# Altium PCB PCB2.PcbDoc (part 2 of 2)
Units mm, origin at the board's own origin, x right, y up, seen from the top; angles counter-clockwise.
Board outline 147.4 x 113.58 mm, 2 copper layers (Top Layer, Bottom Layer); 216 components, 177 nets, 669 pads, 177 vias.
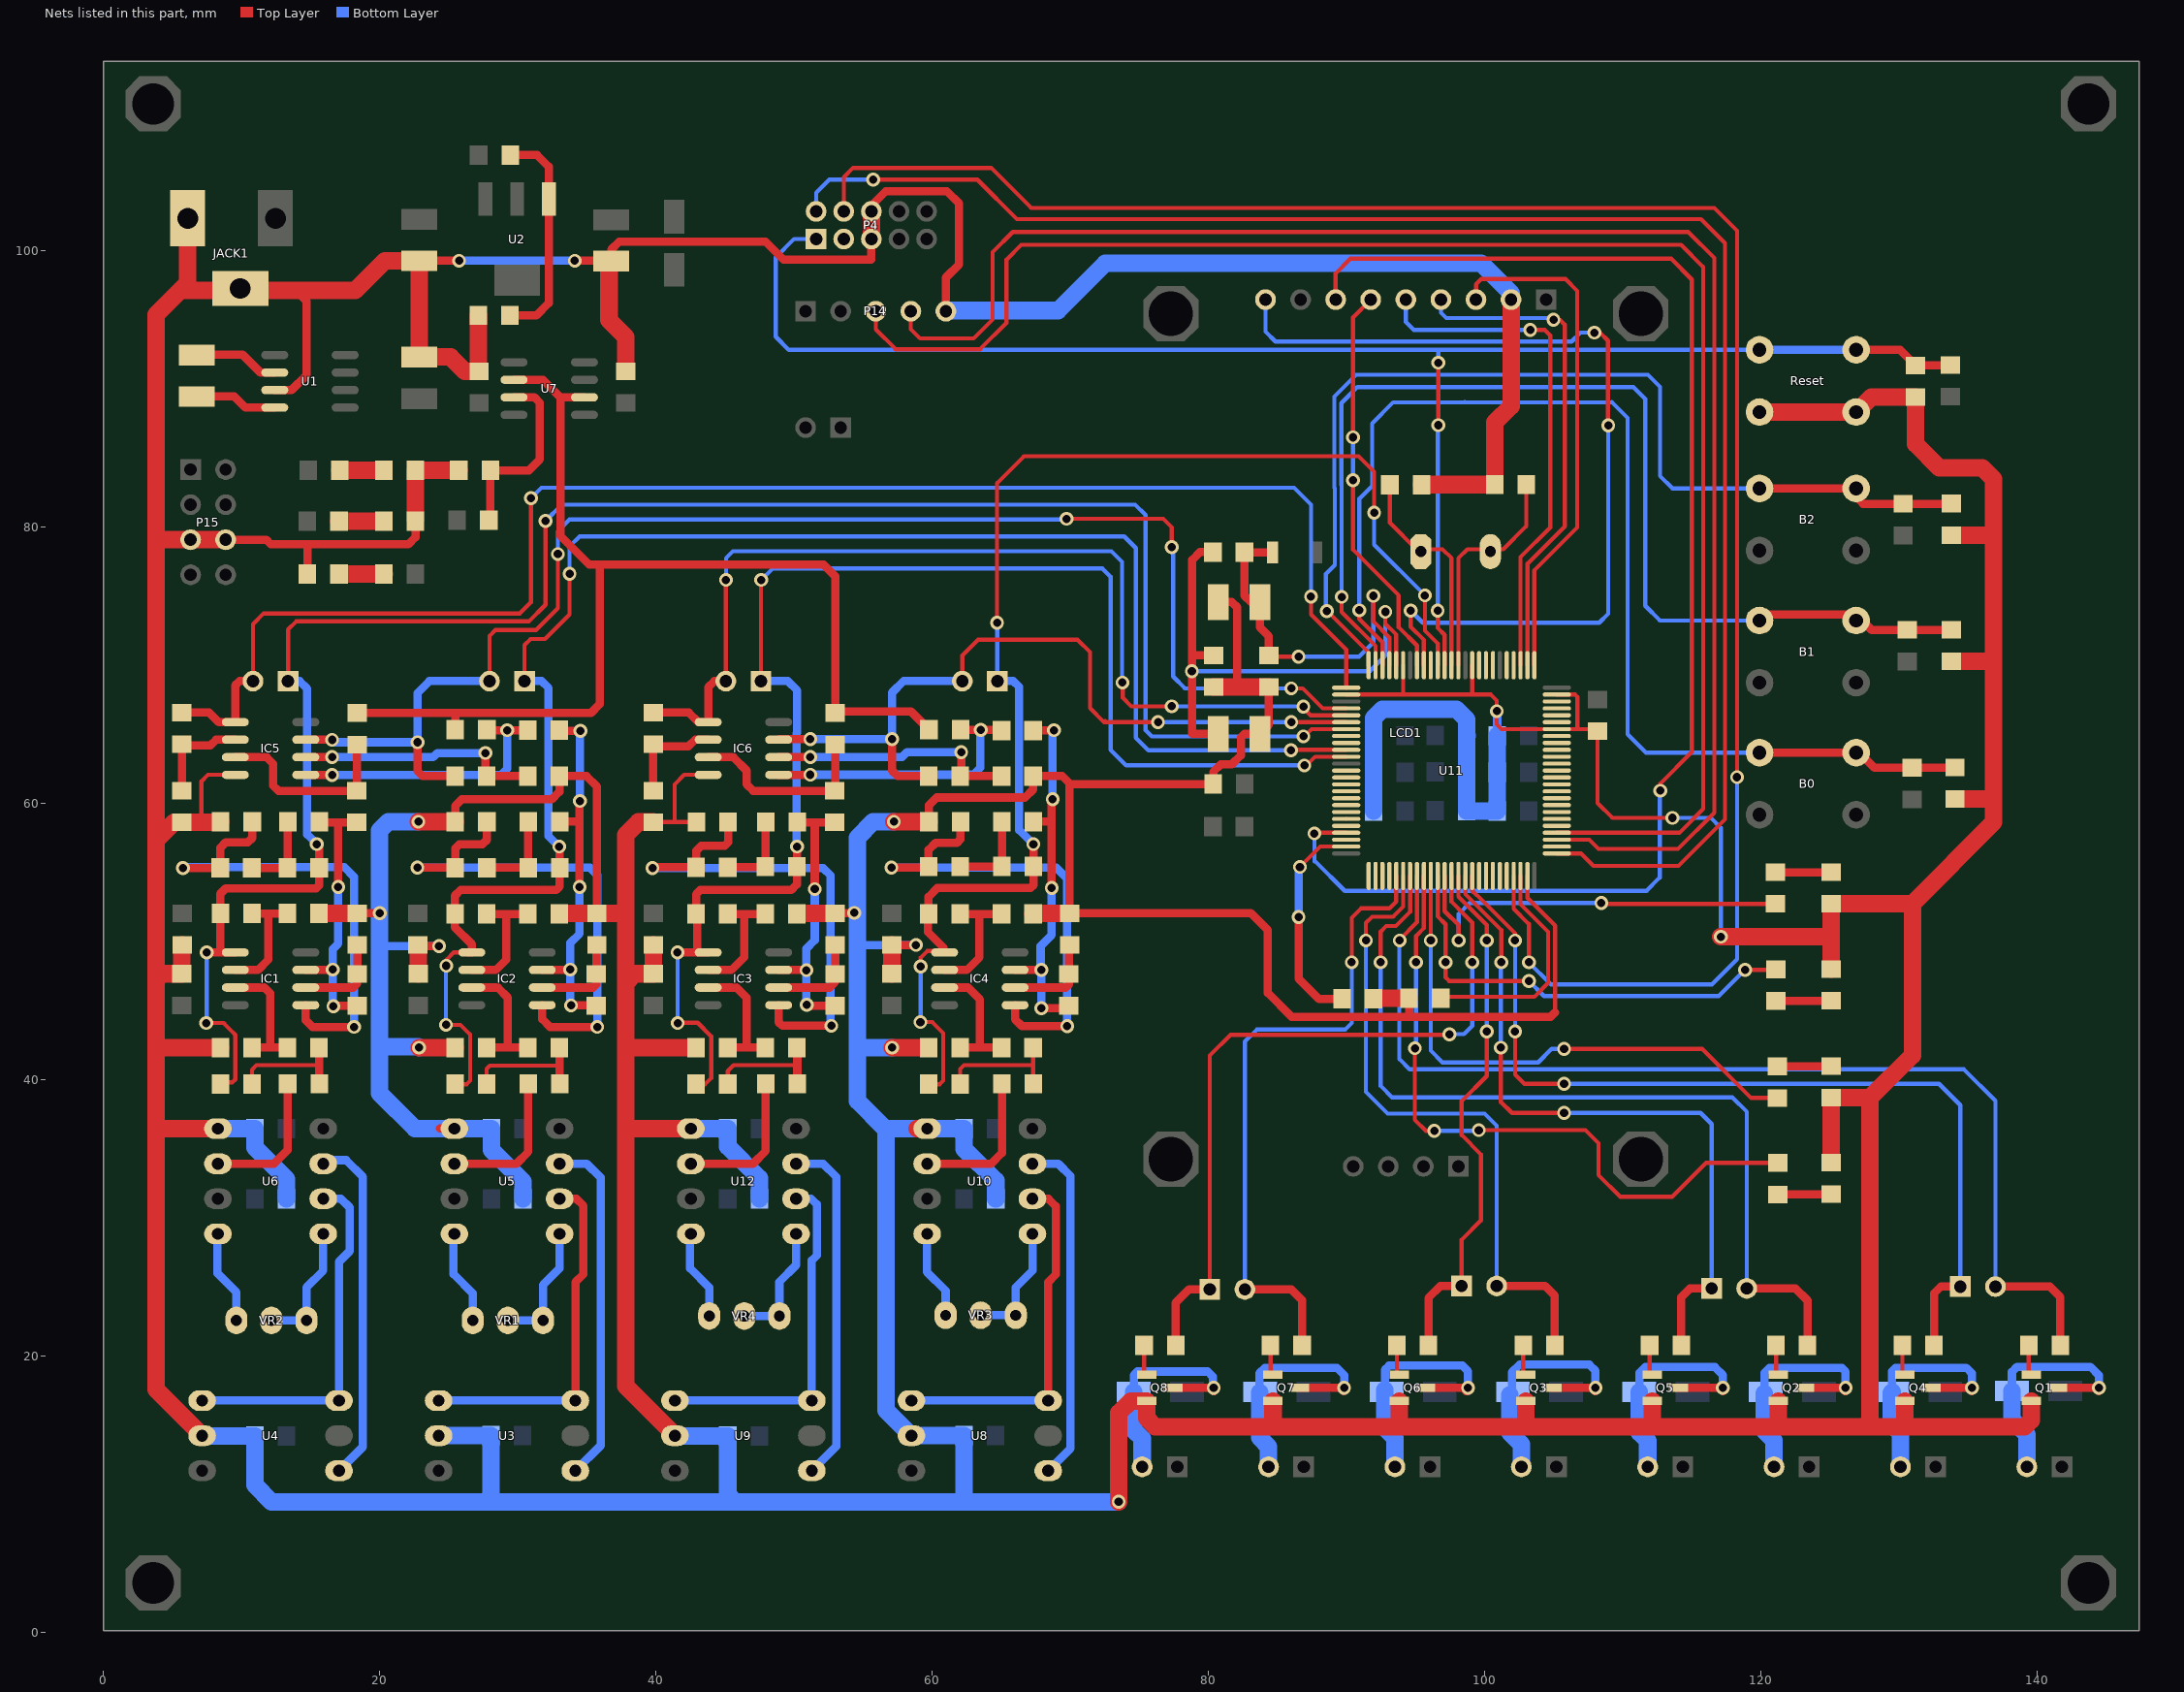
[diagram p2: the nets of this part, all layers, seen from the top]

## Via types
v1: diameter 1, hole 0.6, Top Layer to Bottom Layer, 177 vias

## Nets (pads, with @x,y where several pads share a name; then routed paths per layer and width w, separated by ;. In a path a pad name is that pad's centre, name@x,y a point inside that pad or via, vN(x,y) a via of type N, cw(c..) or ccw(c..) an arc to the next point about the centre after c; other vN are vias at no path point) (continued)
GND: C2.1 C3.2 C4.2 C5.2 C6.2 C7.1 C8.1 C9.2 C10.2 C11.1 C12.1 C13.2 C14.2 C15.1 C16.1 C17.1 C18.1 C21.2 C22.2 C27.2 C28.1 C29.2 C30.1 C31.2 C32.1 C33.1 C34.2 C35.1 C36.1 C37.1 C38.1 C39.1 C40.1 C41.1 C42.1 C43.1 C44.1 C45.1 C46.2 C50.2 C51.2 C52.2 C55.2 C56.2 C61.2 C62.2 C63.2 C64.2 D10.1 IC5.4 IC6.4 JACK1.2 JACK1.3 LCD1.2 P4.5 P4.6 P14.5 P15.5 P15.6 Q1.1 Q2.1 Q3.1 Q4.1 Q5.1 Q6.1 Q7.1 Q8.1 R11.2 R12.2 R13.2 R14.1 R22.1 R23.1 R24.1 R26.1 R28.1 R30.1 R37.1 R39.1 R41.1 R43.1 R44.1 R45.1 R53.1 R54.1 R55.1 R57.1 R59.1 R61.1 R67.1 R69.1 R71.2 R72.2 R73.2 R74.2 Reset.1 U1.3 U3.5 U4.5 U5.5 U6.5 U8.5 U9.5 U10.5 U11.10 U11.20 U11.27 U11.74 U11.94 U11.99 U12.5 | length 1072.8
  Top Layer w0.3: 7.1,58.599 7.1,61.575 7.57,62.045 IC5.4@9.55,62.045 ; R23.1@8.439,58.65 R23.1@8.489,58.7 ; R67.1@39.826,58.625 41.35,58.625 ; R53.1@42.939,58.625 41.35,58.625 ; IC6.4@43.783,62.045 42.045,62.045 41.35,61.35 41.35,58.625 ; U11.27@89.975,67.85 94,67.85 ; U11.20@94.1,69.975 94.1,67.95 94,67.85 ; U11.10@99.1,69.975 99.1,67.85 ; U11.74@103.1,54.725 103.1,53.125 105.1,51.125 105.1,44.85 ; U11.99@105.225,67.85 106.55,67.85 106.725,67.675 106.725,65.35 ; v1(113.6,58.925) 109.25,58.925 108.175,60 C29.2@108.175,65.207 108.032,65.35 106.725,65.35 ; 94,67.85 99.1,67.85 ; 99.1,67.85 100.45,67.85 100.875,67.425 v1(100.875,66.65) 100.875,65.7 101.225,65.35 U11.94@105.225,65.35 106.725,65.35
  Top Layer w0.6: C52.2@8.375,42.389 C52.2@8.464,42.3 ; P15.6@8.851,79.06 11.79,79.06 12.125,78.725 22.075,78.725 22.586,79.236 R13.2@22.586,80.397 ; U1.3@12.4,89.89 13.615,89.89 14.7,90.975 14.7,96.33 13.91,97.12 ; D10.1@14.772,76.588 14.772,78.725 ; R30.1@18.375,52.018 19.993,52.018 v1(20,52.025) ; C21.2@22.8,49.682 22.893,49.775 23.018,49.65 v1(24.3,49.65) ; C3.2@22.875,99.25 v1(25.75,99.25) ; 24.365,36.435 U5.5@25.407,36.435 ; R22.1@25.475,58.65 25.475,59.8 25.95,60.275 32.475,60.275 33.011,60.811 R37.1@33.011,61.95 34.975,61.95 35.725,61.2 R26.1@35.725,52.026 ; v1(34.125,99.25) 36.4,99.25 C4.2@36.6,99.05 ; C4.2@36.775,99.225 36.775,100.075 37.325,100.625 47.95,100.625 49.25,99.325 55.575,99.325 55.597,99.347 P4.5@55.597,100.825 ; R57.1@52.975,52.018 54.382,52.018 54.354,52.046 v1(54.354,52.053) ; P4.6@55.597,102.822 P4.6@55.6,102.825 ; P4.6@55.597,102.825 55.597,103.247 56.625,104.275 61.075,104.275 61.95,103.4 61.95,98.985 60.995,98.03 P14.5@60.995,95.6 P14.5@61.025,95.63 ; C56.2@57.075,49.74 57.09,49.725 v1(58.825,49.725) ; R54.1@59.764,58.65 59.764,59.839 60.325,60.4 66.725,60.4 67.311,60.986 R69.1@67.311,61.95 69.425,61.95 69.95,61.425 R61.1@69.95,52.026 83.074,52.026 84.3,50.8 84.3,46.25 86,44.55 86.025,44.525 104.775,44.525 105.1,44.85 ; 70,61.375 R41.1@80.35,61.375 80.35,62.25 80.9,62.8 81.7,62.8 82.35,63.45 82.35,64.75 82.6,65 C31.2@83.724,65 84.372,65.648 C34.2@84.372,68.407 ; C33.1@80.724,74.55 81.7,74.55 82.075,74.175 82.075,68.407 ; 94.532,44.525 C36.1@94.532,45.875
  Top Layer w1.27: 4.435,79.06 P15.5@6.311,79.06 P15.6@8.851,79.06 ; C22.2@5.7,49.732 5.675,49.707 C50.2@5.675,47.643 4.268,47.643 3.8,47.175 ; JACK1.2@6.1,102.325 6.1,97.65 5.57,97.12 ; U4.5@7.147,14.21 3.8,17.557 3.8,36.525 ; U6.5@8.29,36.435 3.89,36.435 3.8,36.525 ; R23.1@8.389,58.599 7.1,58.599 R39.1@5.675,58.599 5.099,58.599 3.8,57.3 ; R23.1@8.439,58.65 R23.1@8.489,58.65 ; C52.2@8.464,42.3 3.8,42.3 ; JACK1.3@10.1,97.145 JACK1.3@10.125,97.12 ; R28.1@15.6,52 18.357,52 R30.1@18.375,52.018 ; R13.2@22.586,80.5 R11.2@22.586,84.085 R14.1@25.725,84.085 ; C27.2@22.8,47.643 C21.2@22.8,49.682 ; v1(22.8,58.65) R22.1@25.475,58.65 ; v1(22.85,42.3) C51.2@25.45,42.3 ; R12.2@27.146,95.3 27.146,91.309 C10.2@27.197,91.258 26.167,91.258 25.125,92.3 22.9,92.3 C2.1@22.875,92.275 C3.2@22.875,99.25 20.375,99.25 18.245,97.12 13.91,97.12 JACK1.3@10.125,97.12 ; R24.1@33.011,51.975 33.062,52.026 R26.1@35.725,52.026 37.776,52.026 37.8,52.05 ; C4.2@36.6,99.05 36.6,94.975 37.825,93.75 C9.2@37.825,91.258 ; C55.2@39.825,49.74 39.8,49.714 C61.2@39.8,47.643 38.468,47.643 37.8,46.975 ; R67.1@39.826,58.625 38.725,58.625 37.8,57.7 37.8,52.05 ; U9.5@41.38,14.21 37.8,17.79 37.8,36.55 ; U12.5@42.523,36.435 37.915,36.435 37.8,36.55 ; C63.2@42.914,42.3 37.9,42.3 37.8,42.2 ; R55.1@50.211,52.018 R57.1@52.975,52.018 ; P4.5@55.597,100.825 P4.6@55.597,102.825 ; C62.2@57.075,47.643 C56.2@57.075,49.74 ; v1(57.1,42.3) C64.2@59.739,42.3 ; v1(57.225,58.65) R54.1@59.764,58.65 ; U10.5@58.915,36.435 U10.5@59.64,36.435 ; R59.1@67.311,51.975 67.362,52.026 R61.1@69.95,52.026 ; v1(73.5,9.425) 73.5,15.85 74.375,16.725 Q8.1@75.525,16.725 75.525,15.475 76.15,14.85 84.7,14.85 ; C32.1@80.376,68.407 82.075,68.407 C34.2@84.372,68.407 ; Q7.1@84.675,16.725 84.675,14.875 84.7,14.85 ; C35.1@91.968,45.825 92.018,45.875 C36.1@94.532,45.875 ; Q6.1@93.825,16.725 93.825,14.925 93.9,14.85 ; C30.1@95.421,83.025 95.446,83.05 C28.1@100.729,83.05 100.729,87.554 101.913,88.738 LCD1.2@101.913,96.441 ; Q3.1@102.975,16.725 102.975,14.95 103.075,14.85 ; Q5.1@112.125,16.725 112.125,14.9 112.175,14.85 ; v1(117.1,50.325) 125.075,50.325 ; Reset.1@119.9,88.3 Reset.1@126.9,88.3 127.994,89.394 C46.2@131.2,89.394 131.2,86 132.925,84.275 136.025,84.275 136.855,83.445 136.855,70.27 ; Q2.1@121.275,16.725 121.275,14.9 121.325,14.85 ; R74.2@125.075,33.983 125.1,34.008 R73.2@125.1,38.674 127.9,38.674 ; R72.2@125.075,47.988 125.075,50.325 ; Q4.1@130.425,16.725 130.425,14.95 130.525,14.85 ; R44.1@133.8,70.27 136.855,70.27 ; R45.1@133.8,79.395 136.695,79.395 136.855,79.555 ; R43.1@134.05,60.295 136.855,60.295 ; Q1.1@139.575,16.725 139.575,15.325 139.1,14.85 130.525,14.85 ; 3.8,36.525 3.8,42.3 ; 3.8,42.3 3.8,47.175 ; 3.8,47.175 3.8,57.3 ; 3.8,57.3 3.8,95.35 5.57,97.12 ; 5.57,97.12 JACK1.3@10.125,97.12 ; 37.8,36.55 37.8,42.2 ; 37.8,42.2 37.8,46.975 ; 37.8,46.975 37.8,52.05 ; 84.7,14.85 93.9,14.85 ; 93.9,14.85 103.075,14.85 ; 103.075,14.85 112.175,14.85 ; 112.175,14.85 121.325,14.85 ; 121.325,14.85 127.475,14.85 ; 125.075,50.325 R71.2@125.075,52.724 130.974,52.724 ; 127.475,14.85 130.525,14.85 ; 127.475,14.85 127.9,15.275 127.9,38.674 ; 127.9,38.674 130.974,41.748 130.974,52.724 ; 130.974,52.724 136.855,58.605 136.855,60.295 ; 136.855,60.295 136.855,70.27
  Bottom Layer w0.3: v1(113.6,58.925) 116.375,58.925 117.1,58.2 v1@117.1,50.25
  Bottom Layer w0.6: 20.175,49.65 v1(24.3,49.65) ; v1(25.75,99.25) v1(34.125,99.25) ; 54.575,49.825 54.7,49.7 54.725,49.725 v1(58.825,49.725) ; v1(100.875,66.65) 100.875,66.711 100.907,66.743 C43.1@100.907,64.875
  Bottom Layer w1.27: U4.5@7.147,14.21 7.16,14.197 C8.1@10.97,14.197 10.97,10.63 12.175,9.425 27.65,9.425 ; U6.5@8.29,36.435 8.303,36.422 C12.1@10.97,36.422 10.97,35.055 13.256,32.769 C6.2@13.256,31.342 ; v1(22.8,58.65) 20.625,58.65 20,58.025 v1(20,52.025) 20,42.35 ; v1(22.85,42.3) 22.8,42.35 20,42.35 ; U3.5@24.264,14.21 24.276,14.223 C7.1@28.061,14.223 28.061,9.8 ; 28.061,9.836 27.65,9.425 ; C5.2@30.372,31.342 30.372,32.603 28.086,34.889 C11.1@28.086,36.422 25.419,36.422 U5.5@25.407,36.435 22.565,36.435 20,39 20,42.35 ; U9.5@41.38,14.21 41.393,14.197 C16.1@45.203,14.197 45.203,9.425 ; U12.5@42.523,36.435 42.536,36.422 C18.1@45.203,36.422 45.203,35.122 47.489,32.836 C14.2@47.489,31.342 ; 45.453,9.425 73.275,9.425 73.475,9.625 v1@73.5,9.625 ; 45.453,9.675 45.203,9.425 ; v1(57.1,42.3) 54.6,42.3 54.575,42.275 ; v1(57.225,58.65) 55.725,58.65 54.575,57.5 54.575,49.825 54.575,42.275 ; P14.5@60.995,95.6 61.045,95.65 69.125,95.65 72.535,99.06 99.74,99.06 101.913,96.887 LCD1.2@101.913,96.441 ; 62.294,9.425 C15.1@62.294,14.223 62.282,14.21 U8.5@58.497,14.21 56.662,16.045 56.662,36.363 56.59,36.435 ; C13.2@64.606,31.342 64.606,32.669 62.32,34.955 C17.1@62.32,36.422 59.653,36.422 U10.5@59.64,36.435 56.59,36.435 ; C38.1@91.957,59.425 C39.1@91.957,62.225 C40.1@91.957,64.875 91.957,66.157 92.6,66.8 97.95,66.8 98.693,66.057 C37.1@98.693,64.9 ; C37.1@98.718,64.875 C37.1@98.693,64.9 ; C43.1@100.907,64.875 C42.1@100.907,62.225 C41.1@100.907,59.425 98.718,59.425 C44.1@98.693,59.45 C45.1@98.693,62.25 C37.1@98.693,64.9 ; 27.65,9.425 45.203,9.425 ; 54.575,42.275 54.575,38.45 56.59,36.435
LCD_CS: LCD1.3 U11.1 | length 37.3
  Top Layer w0.3: LCD1.3@99.373,96.441 99.373,97.548 99.75,97.925 105.85,97.925 106.7,97.075 106.7,79.95 103.6,76.85 U11.1@103.6,69.975
LCD_DC: LCD1.5 U11.3 | length 37.2
  Top Layer w0.3: U11.3@102.6,69.975 102.6,77.8 104.75,79.95 104.75,93.85 104.35,94.25 v1(103.3,94.25)
  Bottom Layer w0.3: LCD1.5@94.293,96.441 94.293,94.832 94.875,94.25 v1(103.3,94.25)
LCD_MISO: LCD1.9 U11.17 | length 67
  Top Layer w0.3: v1@94.65,73.9 94.65,72.75 95.6,71.8 U11.17@95.6,69.975 ; v1(107.95,94.05) 108.35,94.05 108.925,93.475 108.925,87.35 v1(108.95,87.325)
  Bottom Layer w0.3: LCD1.9@84.133,96.441 84.133,94.117 84.85,93.4 106.3,93.4 106.95,94.05 v1(107.95,94.05) ; v1(94.65,73.925) 95.525,73.05 108.3,73.05 108.95,73.7 v1(108.95,87.325)
LCD_MOSI: LCD1.6 U11.18 | length 28.9
  Top Layer w0.3: v1(90.475,83.375) 90.475,78.325 93.775,75.025 93.775,72.725 95.1,71.4 U11.18@95.1,69.975 ; v1(90.475,86.475) 90.475,95.163 LCD1.6@91.753,96.441
  Bottom Layer w0.3: v1(90.475,83.375) v1(90.475,86.475)
LCD_RST: LCD1.4 U11.2 | length 36.1
  Top Layer w0.3: U11.2@103.1,69.975 103.1,77.325 105.8,80.025 105.8,94.625 105.425,95 105.405,94.98 v1(104.981,94.98)
  Bottom Layer w0.3: LCD1.4@96.833,96.441 96.833,95.492 97.225,95.1 104.862,95.1 v1(104.981,94.98)
LCD_SCLK: LCD1.7 U11.47 | length 103.5
  Top Layer w0.3: v1@87.675,57.85 U11.47@89.975,57.85 ; LCD1.7@89.213,96.441 89.213,98.338 90.275,99.4 113.5,99.4 115,97.9 115,63.7 112.725,61.425 v1(112.725,60.9)
  Bottom Layer w0.3: 87.675,55.775 v1(87.675,57.8) ; 87.75,55.775 89.875,53.65 111.725,53.65 112.675,54.6 112.675,60.85 v1(112.725,60.9)
NetC1_1: C1.1 U1.2 | length 6.2
  Top Layer w0.6: C1.1@6.741,92.425 6.766,92.45 10.075,92.45 11.365,91.16 U1.2@12.4,91.16
NetC1_2: C1.2 U1.4 | length 6
  Top Layer w0.6: C1.2@6.741,89.425 9.475,89.425 10.28,88.62 U1.4@12.4,88.62
NetC19_1: C19.1 R18.2 R19.1 | length 9.1
  Top Layer w0.3: C19.1@27.736,39.65 27.736,40.761 27.975,41 33.036,41
  Top Layer w0.6: R19.1@33.011,42.3 33.036,42.275 33.036,41 R18.2@33.036,39.675
NetC20_1: C20.1 R20.2 R21.1 | length 8.7
  Top Layer w0.3: C20.1@10.75,39.65 10.75,40.7 11.075,41.025 15.625,41.025
  Top Layer w0.6: R21.1@15.6,42.3 15.625,42.275 15.625,41.025 R20.2@15.625,39.675
NetC23_2: C23.2 C24.1 R16.1 | length 6.3
  Top Layer w0.6: C24.1@27.761,55.325 C23.2@30.75,55.325 R16.1@30.75,58.65
NetC24_2: C24.2 IC2.5 R22.2 | length 37.6
  Top Layer w0.6: v1(22.727,55.325) C24.2@25.475,55.325 25.475,56.725 25.775,57.025 27.45,57.025 27.761,57.336 R22.2@27.761,58.65 ; IC2.5@31.767,45.376 31.767,44.358 32.325,43.8 v1(35.75,43.8)
  Bottom Layer w0.6: v1@22.727,55.529 22.727,55.448 22.85,55.325 35.225,55.325 35.75,54.8 v1(35.75,43.8)
NetC25_2: C25.2 C26.1 R17.1 | length 5.9
  Top Layer w0.6: C26.1@10.743,55.3 13.307,55.3 C25.2@13.332,55.325 13.332,58.625 R17.1@13.357,58.65
NetC26_2: C26.2 IC1.5 R23.2 | length 36.7
  Top Layer w0.6: v1@5.626,55.454 5.78,55.3 C26.2@8.457,55.3 8.457,56.757 8.85,57.15 10.45,57.15 10.775,57.475 R23.2@10.775,58.65 ; IC1.5@14.65,45.376 14.65,44.275 15.125,43.8 v1(18.15,43.8)
  Bottom Layer w0.6: v1@5.626,55.454 5.626,55.374 17.426,55.374 18.15,54.65 v1(18.15,43.8)
  other v1: 5.75,55.3
NetC28_2: C28.2 U11.12 Y1.2 | length 16.6
  Top Layer w0.3: U11.12@98.1,69.975 98.1,77.725 98.75,78.375 101.35,78.375 103.015,80.04 C28.2@103.015,83.05
NetC30_2: C30.2 U11.13 Y1.1 | length 16
  Top Layer w0.3: C30.2@93.135,83.025 93.135,80.29 95.05,78.375 96.95,78.375 97.6,77.725 U11.13@97.6,69.975
NetC31_1: C31.1 C32.2 R35.2 U11.21 | length 39.6
  Top Layer w0.3: v1(92.809,73.841) 92.809,72.984 93.6,72.193 U11.21@93.6,69.975
  Top Layer w0.6: R35.2@80.325,78.16 79.385,78.16 78.825,77.6 78.825,70.75 ; C32.2@80.376,70.693 78.882,70.693 78.825,70.75 ; C31.1@80.724,65 78.825,65 78.825,70.75
  Bottom Layer w0.3: v1(78.8,69.55) 91.7,69.55 92.809,70.659 v1(92.809,73.841)
NetC33_2: C33.2 C34.1 L1.2 R35.1 U11.22 | length 27.7
  Top Layer w0.3: C34.1@84.372,70.693 84.375,70.696 84.604,70.925 84.929,70.6 v1(86.525,70.6) ; v1(91.95,75) 91.95,73.136 93.1,71.986 U11.22@93.1,69.975
  Top Layer w0.6: C34.1@84.375,70.696 84.375,72.075 83.724,72.726 C33.2@83.724,74.55 83.072,74.55 82.611,75.011 R35.1@82.611,78.16 82.634,78.137 L1.2@84.65,78.137
  Bottom Layer w0.3: v1(86.525,70.6) 90.9,70.6 91.95,71.65 v1(91.95,75)
NetC35_2: C35.2 U11.49 | length 16.1
  Top Layer w0.3: v1@86.35,55.375 v1(86.625,55.375) 88.1,56.85 U11.49@89.975,56.85
  Top Layer w0.6: v1(86.525,51.75) 86.525,47.3 88,45.825 C35.2@89.682,45.825
  Bottom Layer w0.6: v1(86.525,51.75) 86.525,55.275 v1(86.625,55.375)
NetC36_2: C36.2 U11.73 | length 16.8
  Top Layer w0.3: C36.2@96.818,45.875 96.918,45.975 103.6,45.975 104.6,46.975 104.6,50.675 102.6,52.675 U11.73@102.6,54.725
NetC51_1: C51.1 IC2.3 R19.2 | length 9.5
  Top Layer w0.6: IC2.3@26.667,46.646 28.554,46.646 29.275,45.925 29.275,42.325 ; C51.1@27.736,42.3 27.761,42.325 29.275,42.325 ; R19.2@30.725,42.3 30.7,42.325 29.275,42.325
NetC52_1: C52.1 IC1.3 R21.2 | length 9
  Top Layer w0.6: IC1.3@9.55,46.646 11.654,46.646 12.075,46.225 12.075,42.45 ; C52.1@10.75,42.3 R21.2@13.314,42.3
NetC53_1: C53.1 R49.2 R50.1 | length 8.8
  Top Layer w0.3: C53.1@45.2,39.65 45.2,40.6 45.625,41.025 50.236,41.025
  Top Layer w0.6: R50.1@50.211,42.3 50.236,42.275 50.236,41.025 R49.2@50.236,39.675
NetC54_1: C54.1 R51.2 R52.1 | length 9.1
  Top Layer w0.3: C54.1@62.025,39.65 62.025,40.75 62.3,41.025 67.311,41.025 ; R52.1@67.311,42.3 67.311,41.025 ; R51.2@67.336,39.675 67.311,39.701 67.311,41.025
NetC57_2: C57.2 C58.1 R47.1 | length 6
  Top Layer w0.6: C58.1@45.2,55.35 47.925,55.35 47.925,58.6 R47.1@47.95,58.625
NetC58_2: C58.2 IC3.5 R53.2 | length 37.6
  Top Layer w0.6: v1(39.75,55.3) 39.8,55.35 C58.2@42.914,55.35 42.914,56.539 43.275,56.9 44.975,56.9 45.225,57.15 R53.2@45.225,58.625 ; IC3.5@48.883,45.376 48.883,44.142 49.15,43.875 v1(52.7,43.875)
  Bottom Layer w0.6: v1(39.75,55.3) 52.1,55.3 52.65,54.75 52.65,43.925 v1(52.7,43.875)
NetC59_2: C59.2 C60.1 R48.1 | length 6.3
  Top Layer w0.6: C60.1@62.025,55.4 65.025,55.4 C59.2@65.05,55.425 R48.1@65.05,58.65
NetC60_2: C60.2 IC4.5 R54.2 | length 36.3
  Top Layer w0.6: v1@57.175,55.325 59.664,55.325 C60.2@59.739,55.4 59.739,56.614 60.25,57.125 61.8,57.125 62.05,57.375 R54.2@62.05,58.65 ; IC4.5@66,45.376 66,44.35 66.5,43.85 v1(69.775,43.85)
  Bottom Layer w0.6: v1@57.175,55.325 68.975,55.325 69.775,54.525 v1(69.775,43.85)
  other v1: 57.05,55.325
NetC63_1: C63.1 IC3.3 R50.2 | length 9.4
  Top Layer w0.6: IC3.3@43.783,46.646 45.829,46.646 46.562,45.913 46.562,42.3 ; C63.1@45.2,42.3 46.562,42.3 ; R50.2@47.925,42.3 46.562,42.3
NetC64_1: C64.1 IC4.3 R52.2 | length 9.4
  Top Layer w0.6: IC4.3@60.9,46.646 62.604,46.646 63.45,45.8 63.45,42.3 ; C64.1@62.025,42.3 63.45,42.3 ; R52.2@65.025,42.3 63.45,42.3
NetD1_1: D1.1 P1.2 Q1.2 | length 17.9
  Top Layer w0.6: Q1.2@141.475,17.675 v1@144.45,17.675 ; v1@144.45,17.425 v1@144.475,17.45
  Bottom Layer w0.6: D1.1@138.175,17.45 138.175,18.825 138.55,19.2 143.85,19.2 144.475,18.575 v1(144.475,17.675)
  Bottom Layer w1.27: D1.1@138.175,17.45 138.175,15.375 139.255,14.295 P1.2@139.255,11.95
NetD2_1: D2.1 P3.2 Q2.2 | length 17.4
  Top Layer w0.6: Q2.2@123.175,17.675 v1@126.106,17.675 ; v1@126.106,17.425 v1@126.132,17.452
  Bottom Layer w0.6: D2.1@120.25,17.275 120.25,18.75 120.6,19.1 125.875,19.1 126.132,18.843 v1(126.132,17.675)
  Bottom Layer w1.27: D2.1@120.25,17.275 120.25,14.575 120.955,13.87 P3.2@120.955,11.95
NetD3_1: D3.1 P5.2 Q5.2 | length 17.7
  Top Layer w0.6: Q5.2@114.025,17.675 v1(117.25,17.675)
  Bottom Layer w0.6: D3.1@111.2,17.375 111.2,18.75 111.625,19.175 116.675,19.175 117.25,18.6 v1(117.25,17.675)
  Bottom Layer w1.27: D3.1@111.2,17.375 111.2,14.45 111.805,13.845 P5.2@111.805,11.95
NetD4_1: D4.1 P6.2 Q3.2 | length 18.1
  Top Layer w0.6: Q3.2@104.875,17.675 v1@107.975,17.675 ; v1@107.975,17.425 v1@108.025,17.475
  Bottom Layer w0.6: D4.1@101.825,17.15 101.975,17.3 101.975,18.8 102.525,19.35 107.575,19.35 108.025,18.9 v1(108.025,17.675)
  Bottom Layer w1.27: D4.1@101.825,17.15 101.825,14.425 102.655,13.595 P6.2@102.655,11.95
NetD5_1: D5.1 P2.2 Q4.2 | length 17.3
  Top Layer w0.6: Q4.2@132.325,17.675 v1@135.231,17.675 ; v1@135.231,17.425 v1@135.283,17.477
  Bottom Layer w0.6: D5.1@129.5,17.375 129.5,18.875 129.75,19.125 134.875,19.125 135.283,18.717 v1(135.283,17.675)
  Bottom Layer w1.27: D5.1@129.5,17.375 129.425,17.3 129.425,15.075 130.105,14.395 P2.2@130.105,11.95
NetD6_1: D6.1 P7.2 Q6.2 | length 17.9
  Top Layer w0.6: Q6.2@95.725,17.675 v1@98.65,17.675 ; v1@98.65,17.425 v1@98.8,17.425
  Bottom Layer w0.6: D6.1@92.775,17.5 92.775,18.975 93.075,19.275 98.4,19.275 98.8,18.875 v1(98.8,17.675)
  Bottom Layer w1.27: D6.1@92.775,17.5 92.775,14.775 93.505,14.045 P7.2@93.505,11.95
NetD7_1: D7.1 P11.2 Q7.2 | length 17.7
  Top Layer w0.6: Q7.2@86.575,17.675 v1@89.8,17.675 ; v1@89.8,17.425 v1@89.825,17.45
  Bottom Layer w0.6: D7.1@83.7,17.325 83.7,18.725 84.1,19.125 89.3,19.125 89.825,18.6 v1(89.825,17.675)
  Bottom Layer w1.27: D7.1@83.7,17.325 83.7,14.075 84.355,13.42 P11.2@84.355,11.95
NetD8_1: D8.1 P12.2 Q8.2 | length 17
  Top Layer w0.6: Q8.2@77.425,17.675 v1@80.4,17.675 ; v1@80.35,17.507 80.38,17.477 80.38,17.445 v1@80.4,17.425
  Bottom Layer w0.6: D8.1@74.6,17.375 74.6,18.6 74.85,18.85 79.95,18.85 80.325,18.475 80.325,17.532 v1@80.38,17.477
  Bottom Layer w1.27: D8.1@74.6,17.375 74.6,14.6 75.205,13.995 P12.2@75.205,11.95
  other v1: 80.38,17.675
NetD10_2: D10.2 R9.1 | length 3.2
  Top Layer w1.27: D10.2@17.133,76.575 R9.1@20.342,76.575
NetD11_2: D11.2 R11.1 | length 3.2
  Top Layer w1.27: D11.2@17.108,84.085 R11.1@20.3,84.085
NetD12_2: D12.2 R13.1 | length 3.1
  Top Layer w1.27: D12.2@17.058,80.397 R13.1@20.197,80.397
NetD13_2: D13.2 R71.1 | length 4
  Top Layer w0.6: D13.2@121.047,54.99 125.055,54.99 R71.1@125.075,55.01
NetD14_2: D14.2 R72.1 | length 4
  Top Layer w0.6: D14.2@121.072,45.676 125.05,45.676 R72.1@125.075,45.702
NetD15_2: D15.2 R73.1 | length 3.9
  Top Layer w0.6: D15.2@121.203,40.94 125.08,40.94 R73.1@125.1,40.96
NetD16_2: D16.2 R74.1 | length 3.9
  Top Layer w0.6: D16.2@121.228,31.672 125.05,31.672 R74.1@125.075,31.697
NetIC1_2: IC1.2 R28.2 R29.1 | length 8.6
  Top Layer w0.6: IC1.2@9.55,47.916 11.191,47.916 11.925,48.65 11.925,52 ; R29.1@10.75,52 11.925,52 ; R28.2@13.314,52 11.925,52
NetIC1_6: IC1.6 R30.2 R31.1 | length 6.6
  Top Layer w0.6: IC1.6@14.65,46.646 18.071,46.646 18.343,46.918 18.343,47.65 18.375,47.682 R30.2@18.375,49.732
NetIC2_2: IC2.2 R24.2 R25.1 | length 9.2
  Top Layer w0.6: IC2.2@26.667,47.916 28.416,47.916 29.15,48.65 29.15,51.825 29.3,51.975 ; R25.1@27.736,51.975 29.3,51.975 ; R24.2@30.725,51.975 29.3,51.975
NetIC2_6: IC2.6 R26.2 R27.1 | length 6.9
  Top Layer w0.6: IC2.6@31.767,46.646 35.446,46.646 35.675,46.875 R27.1@35.675,47.618 35.675,49.69 R26.2@35.725,49.74
NetIC3_2: IC3.2 R55.2 R56.1 | length 8.9
  Top Layer w0.6: IC3.2@43.783,47.916 45.466,47.916 46.4,48.85 46.4,51.975 ; R56.1@45.2,51.975 46.4,51.975 ; R55.2@47.925,51.975 46.4,51.975
NetIC3_6: IC3.6 R57.2 R58.1 | length 6.8
  Top Layer w0.6: IC3.6@48.883,46.646 52.396,46.646 ; 52.571,46.646 52.968,47.043 52.968,47.625 R58.1@52.975,47.618 R57.2@52.975,49.732
NetIC4_2: IC4.2 R59.2 R60.1 | length 9.1
  Top Layer w0.6: IC4.2@60.9,47.916 62.516,47.916 63.425,48.825 63.425,51.975 ; R60.1@62.025,51.975 63.425,51.975 ; R59.2@65.025,51.975 63.425,51.975
NetIC4_6: IC4.6 R61.2 R62.1 | length 6.9
  Top Layer w0.6: IC4.6@66,46.646 69.671,46.646 69.9,46.875 R62.1@69.9,47.618 69.9,49.69 R61.2@69.95,49.74
NetIC5_2: IC5.2 R39.2 R46.1 | length 7.5
  Top Layer w0.6: R39.2@5.675,60.885 R46.1@5.675,64.264 5.764,64.175 7.75,64.175 8.16,64.585 IC5.2@9.55,64.585
NetIC5_3: IC5.3 R33.2 R36.2 | length 14.1
  Top Layer w0.6: IC5.3@9.55,63.315 11.81,63.315 12.275,62.85 12.275,61.275 12.665,60.885 R33.2@18.35,60.885 18.35,64.213 R36.2@18.375,64.239
NetIC5_5: IC5.5 R32.2 R34.2 | length 20.6
  Top Layer w0.6: IC5.5@14.65,62.045 14.67,62.025 v1(16.55,62.025) v1@16.575,62.025 ; R34.2@27.761,65.325 27.811,65.275 v1(29.225,65.275) R32.2@30.725,65.275
  Bottom Layer w0.6: v1@16.575,62.025 28.775,62.025 29.225,62.475 v1(29.225,65.275)
NetIC5_6: IC5.6 R37.2 R38.1 | length 18
  Top Layer w0.6: IC5.6@14.65,63.315 16.54,63.315 v1(16.55,63.325) ; v1(27.65,63.625) 27.65,62.414 27.925,62.139 R38.1@27.736,61.95 R37.2@30.725,61.95
  Bottom Layer w0.6: v1(16.55,63.325) 23.875,63.325 24.175,63.625 v1(27.65,63.625) v1@27.675,63.625
NetIC6_2: IC6.2 R67.2 R68.1 | length 7.3
  Top Layer w0.6: R67.2@39.8,60.885 39.8,63.936 39.964,64.1 42.35,64.1 42.835,64.585 IC6.2@43.783,64.585
NetIC6_3: IC6.3 R63.2 R65.2 | length 14.2
  Top Layer w0.6: IC6.3@43.783,63.315 45.61,63.315 46.575,62.35 46.575,61.35 47.04,60.885 R63.2@52.95,60.885 53,60.885 53,64.039 R65.2@52.8,64.239
NetIC6_5: IC6.5 R64.2 R66.2 | length 20.6
  Top Layer w0.6: IC6.5@48.883,62.045 51.22,62.045 v1@51.225,62.05 ; R66.2@62.05,65.325 62.075,65.3 v1(63.525,65.3) 64.975,65.3 R64.2@65.025,65.25
  Bottom Layer w0.6: v1@51.225,62.05 62.975,62.05 63.475,62.55 63.475,65.25 v1(63.525,65.3)
  other v1: 51.175,62.05
NetIC6_6: IC6.6 R69.2 R70.1 | length 18.1
  Top Layer w0.6: IC6.6@48.883,63.315 51.265,63.315 v1@51.275,63.325 ; v1(62.1,63.675) 62.1,62.025 R70.1@62.025,61.95 R69.2@65.025,61.95
  Bottom Layer w0.6: v1@51.275,63.325 57.825,63.325 58.175,63.675 v1(62.1,63.675)
  other v1: 51.175,63.325
NetQ1_3: Q1.3 R1.1 | length 2.2
  Top Layer w0.3: Q1.3@139.395,18.555 R1.1@139.395,20.75
NetQ2_3: Q2.3 R2.1 | length 2.2
  Top Layer w0.3: Q2.3@121.095,18.555 R2.1@121.095,20.75
NetQ3_3: Q3.3 R3.1 | length 2.2
  Top Layer w0.3: Q3.3@102.795,18.555 R3.1@102.795,20.75
NetQ4_3: Q4.3 R4.1 | length 2.2
  Top Layer w0.3: Q4.3@130.245,18.555 R4.1@130.245,20.75
NetQ5_3: Q5.3 R5.1 | length 2.2
  Top Layer w0.3: Q5.3@111.945,18.555 R5.1@111.945,20.75
NetQ6_3: Q6.3 R6.1 | length 2.2
  Top Layer w0.3: Q6.3@93.645,18.555 R6.1@93.645,20.75
NetQ7_3: Q7.3 R7.1 | length 2.2
  Top Layer w0.3: Q7.3@84.495,18.555 R7.1@84.495,20.75
NetQ8_3: Q8.3 R8.1 | length 2.2
  Top Layer w0.3: Q8.3@75.345,18.555 R8.1@75.345,20.75
NetR10_2: R10.2 R12.1 U2.1 | length 16.2
  Top Layer w0.6: R12.1@29.432,95.3 31.35,95.3 32.24,96.19 32.24,106.06 31.4,106.9 R10.2@29.45,106.9
NetR14_2: R14.2 R15.1 U7.3 | length 13.7
  Top Layer w0.6: R15.1@27.9,80.475 28.011,80.586 R14.2@28.011,84.085 30.81,84.085 31.6,84.875 31.6,88.975 31.21,89.365 U7.3@29.725,89.365
NetU3_1: U3.1 U3.6 U5.2 | length 26.2
  Top Layer w0.6: U5.2@33.027,31.355 34.245,31.355 34.75,30.85 34.75,25.9 34.17,25.32 U3.1@34.17,16.75
  Bottom Layer w0.6: U3.6@24.264,16.75 U3.1@34.17,16.75
NetU3_3: U3.3 U5.3 | length 25.4
  Bottom Layer w0.6: U5.3@33.027,33.895 34.994,33.895 36,32.889 36,13.5 U3.3@34.17,11.67
NetU4_1: U4.1 U4.6 U6.2 | length 26.4
  Bottom Layer w0.6: U4.6@7.147,16.75 U4.1@17.053,16.75 17.053,26.803 17.825,27.575 17.825,30.725 17.195,31.355 U6.2@15.91,31.355
NetU4_3: U4.3 U6.3 | length 25.5
  Bottom Layer w0.6: U6.3@15.91,33.895 16.165,34.15 17.575,34.15 18.775,32.95 18.775,13.392 U4.3@17.053,11.67
NetU5_1: U5.1 VR1.1 VR1.2 | length 9.3
  Bottom Layer w0.6: VR1.2@29.28,22.55 VR1.1@31.82,22.55 31.82,25.12 33.027,26.327 U5.1@33.027,28.815
NetU5_8: U5.8 VR1.3 | length 6.9
  Bottom Layer w0.6: U5.8@25.407,28.815 25.35,28.758 25.35,25.9 26.74,24.51 VR1.3@26.74,22.55
NetU6_1: U6.1 VR2.1 VR2.2 | length 9.3
  Bottom Layer w0.6: VR2.2@12.164,22.55 VR2.1@14.704,22.55 14.704,24.954 15.91,26.16 U6.1@15.91,28.815
NetU6_8: U6.8 VR2.3 | length 6.9
  Bottom Layer w0.6: U6.8@8.29,28.815 8.25,28.775 8.25,25.975 9.624,24.601 VR2.3@9.624,22.55
NetU8_1: U8.1 U8.6 U10.2 | length 26.1
  Top Layer w0.6: U10.2@67.26,31.355 68.42,31.355 68.95,30.825 68.95,25.875 68.403,25.328 U8.1@68.403,16.75
  Bottom Layer w0.6: U8.6@58.497,16.75 U8.1@68.403,16.75
NetU8_3: U8.3 U10.3 | length 25.1
  Bottom Layer w0.6: U10.3@67.26,33.895 69.13,33.895 70.025,33 70.025,13.292 U8.3@68.403,11.67
NetU9_1: U9.1 U9.6 U12.2 | length 25.9
  Bottom Layer w0.6: U9.6@41.38,16.75 U9.1@51.286,16.75 51.286,26.886 51.643,27.243 51.643,30.957 51.245,31.355 U12.2@50.143,31.355
NetU9_3: U9.3 U12.3 | length 25.3
  Bottom Layer w0.6: U12.3@50.143,33.895 52.105,33.895 53.05,32.95 53.05,13.434 U9.3@51.286,11.67
NetU10_1: U10.1 VR3.1 VR3.2 | length 8.9
  Bottom Layer w0.6: VR3.2@63.514,22.925 VR3.1@66.054,22.925 66.054,24.953 67.26,26.16 U10.1@67.26,28.815
NetU10_8: U10.8 VR3.3 | length 6.5
  Bottom Layer w0.6: U10.8@59.64,28.815 59.625,28.8 59.625,26.05 60.974,24.701 VR3.3@60.974,22.925
NetU12_1: U12.1 VR4.1 VR4.2 | length 9
  Bottom Layer w0.6: VR4.2@46.397,22.875 VR4.1@48.937,22.875 48.937,25.337 50.15,26.55 50.15,28.808 U12.1@50.143,28.815
NetU12_8: U12.8 VR4.3 | length 6.5
  Bottom Layer w0.6: U12.8@42.523,28.815 42.475,28.767 42.475,26.325 43.857,24.943 VR4.3@43.857,22.875
NRST: C46.1 P4.1 R42.2 Reset.2 U11.14 | length 118.2
  Top Layer w0.3: v1(96.6,73.925) 96.6,72.675 97.1,72.175 U11.14@97.1,69.975 ; v1(96.65,87.35) v1(96.65,91.875)
  Top Layer w0.6: Reset.2@126.9,92.8 130.08,92.8 C46.1@131.2,91.68 133.7,91.68 R42.2@133.725,91.706
  Bottom Layer w0.3: P4.1@51.597,100.825 50,100.825 48.675,99.5 48.675,93.75 49.625,92.8 96.625,92.8 ; v1(96.6,73.925) v1@96.662,73.987 ; v1@96.6,73.987 v1@96.6,87.338 ; v1(96.65,87.35) v1@96.662,87.338 ; v1(96.65,91.875) 96.65,92.775 96.625,92.8 ; Reset.2@119.9,92.8 96.625,92.8
  Bottom Layer w0.6: Reset.2@119.9,92.8 Reset.2@126.9,92.8
PA0: B0.2 C47.1 R43.2 U11.23 | length 85.6
  Top Layer w0.3: v1(90.925,73.95) 90.925,73.325 92.6,71.65 U11.23@92.6,69.975
  Top Layer w0.6: B0.2@120.125,63.65 B0.2@126.9,63.65 127.125,63.65 128.219,62.556 C47.1@130.95,62.556 134.025,62.556 R43.2@134.05,62.581
  Bottom Layer w0.3: v1(90.925,73.95) 90.925,82.025 91.85,82.95 91.85,87.475 93.375,89 98.525,89 98.55,89.025 ; 98.55,89 109.2,89 ; 109.2,89.025 110.35,87.875 110.35,64.975 111.675,63.65 B0.2@119.9,63.65
PA1: B1.2 C48.1 R44.2 U11.24 | length 80.9
  Top Layer w0.3: v1(89.65,74.925) 89.65,73.825 92.1,71.375 U11.24@92.1,69.975
  Top Layer w0.6: B1.2@119.9,73.65 126.9,73.65 128.02,72.53 C48.1@130.6,72.53 133.774,72.53 R44.2@133.8,72.556
  Bottom Layer w0.3: v1(89.65,74.925) 89.65,82.998 89.625,83.023 89.625,88.95 90.775,90.1 110.775,90.1 111.625,89.25 111.625,74.275 112.688,73.212 B1.2@119.9,73.212
PA2: B2.2 C49.1 R45.2 U11.25 | length 74.4
  Top Layer w0.3: v1(88.575,73.9) 88.6,73.9 91.6,70.9 U11.25@91.6,69.975
  Top Layer w0.6: B2.2@119.9,82.775 B2.2@126.9,82.775 126.9,82.15 127.395,81.655 C49.1@130.3,81.655 133.774,81.655 R45.2@133.8,81.681
  Bottom Layer w0.3: v1(88.575,73.9) 88.5,73.975 88.5,76.575 89.15,77.225 89.15,82.791 89.125,82.816 89.125,89.425 90.7,91 100.25,91 ; 100.275,91 111.825,91 112.7,90.125 112.7,83.675 113.6,82.775 B2.2@119.9,82.775
PA3: IC5.1 P17.2 R46.2 U11.26 | length 112.9
  Top Layer w0.3: P17.2@10.825,68.825 10.825,72.95 11.6,73.725 30.143,73.725 30.95,74.532 v1(30.95,82.075) ; v1(87.425,74.95) 87.425,73.65 89.975,71.1 U11.26@89.975,68.35
  Top Layer w0.6: R46.2@5.675,66.55 7.65,66.55 8.345,65.855 IC5.1@9.55,65.855 9.55,68.525 9.85,68.825 P17.2@10.825,68.825
  Bottom Layer w0.3: P17.2@10.825,68.825 P17.2@10.825,69.4 ; v1(30.95,82.075) 31.7,82.825 86.2,82.825 87.425,81.6 v1(87.425,74.95)
PA4: IC5.7 P16.2 R38.2 U11.29 | length 106.4
  Top Layer w0.3: P16.2@27.947,68.825 27.947,72.097 28.375,72.525 31.325,72.525 32.9,74.1 v1@32.9,77.925 ; v1@32.775,77.925 32.875,78.025 v1(32.9,78.025) ; v1(69.725,80.575) 76.725,80.575 77.35,79.95 v1(77.35,78.525) ; v1@85.975,68.3 v1(86,68.3) 86.825,68.3 88.275,66.85 U11.29@89.975,66.85
  Top Layer w0.6: IC5.7@14.65,64.585 16.565,64.585 v1@16.575,64.575 ; v1(22.75,64.4) 22.75,62.3 23.1,61.95 R38.2@25.45,61.95
  Bottom Layer w0.3: v1(32.9,78.025) 32.9,79.675 33.75,80.525 69.675,80.525 v1(69.725,80.575) ; v1(77.35,78.525) 77.45,78.425 77.45,69.15 78.3,68.3 v1(86,68.3)
  Bottom Layer w0.6: v1@16.575,64.575 16.75,64.4 v1(22.75,64.4) 22.75,67.975 23.6,68.825 P16.2@27.947,68.825
  other v1: 16.55,64.575
PA5: IC6.1 P18.2 R68.2 U11.30 | length 73
  Top Layer w0.3: P18.2@45.063,68.825 45.063,76.138 v1(45.075,76.15) ; v1(73.775,68.725) 73.8,68.7 73.8,67.625 74.425,67 v1(77.35,67) ; v1(86.875,66.975) 86.875,66.875 87.4,66.35 U11.30@89.975,66.35
  Top Layer w0.6: R68.2@39.8,66.55 42.375,66.55 43.07,65.855 IC6.1@43.783,65.855 43.783,68.383 44.225,68.825 P18.2@45.063,68.825
  Bottom Layer w0.3: v1(45.075,76.15) 45.075,77.725 45.575,78.225 72.975,78.225 73.75,77.45 73.75,68.75 v1(73.775,68.725) ; v1(77.35,67) 86.85,67 v1(86.875,66.975)
PA6: IC6.7 P19.2 R70.2 U11.31 | length 57.2
  Top Layer w0.3: v1@51.135,64.585 v1(51.175,64.625) ; P19.2@62.18,68.825 62.18,70.68 63.325,71.825 70.525,71.825 71.425,70.925 71.425,66.875 72.45,65.85 72.525,65.925 ; 72.525,65.85 v1(76.35,65.85) ; v1(86,65.85) 87.9,65.85 U11.31@89.975,65.85
  Top Layer w0.6: IC6.7@48.883,64.585 48.923,64.625 v1(51.175,64.625) ; v1(57.1,64.625) 57.1,62.35 57.5,61.95 R70.2@59.739,61.95
  Bottom Layer w0.3: v1(76.35,65.85) v1@85.925,65.85 ; v1@85.925,65.925 v1(86,65.85)
  Bottom Layer w0.6: v1(51.175,64.625) v1(57.1,64.625) 57.1,68 57.925,68.825 P19.2@62.18,68.825
PA7: C20.2 C25.1 IC1.1 P17.1 R29.2 U11.32 | length 146.4
  Top Layer w0.3: v1(7.45,44.075) 8.7,44.075 8.9,43.875 8.9,43.873 9.398,43.375 9.4,43.375 9.55,43.225 9.55,40 9.325,39.775 8.589,39.775 C20.2@8.464,39.65 ; P17.1@13.365,68.825 13.365,72.565 13.95,73.15 30.8,73.15 32,74.35 v1(32,80.425) ; v1@87.05,64.975 86.9,64.825 v1(86.875,64.825) 86.95,64.825 87.475,65.35 U11.32@89.975,65.35
  Top Layer w0.6: v1(7.475,49.186) IC1.1@9.55,49.186 ; 8.464,49.275 R29.2@8.464,52 8.464,53.439 8.85,53.825 15.4,53.825 15.618,54.043 C25.1@15.618,55.325 15.618,56.857 v1(15.45,57.025)
  Bottom Layer w0.3: v1(7.45,44.075) 7.475,44.1 7.475,48.946 7.236,49.186 v1(7.475,49.186) ; v1(32,80.425) 33.175,81.6 74.7,81.6 75.45,80.85 75.45,65.275 75.9,64.825 v1(86.875,64.825)
  Bottom Layer w0.6: P17.1@13.365,68.825 14.2,68.825 14.75,68.275 14.75,57.725 v1(15.45,57.025)
PA8: U11.67
PA9: U11.68
PA10: U11.69
PA11: U11.70
PA12: U11.71
PA13: P4.4 U11.72 | length 145.2
  Top Layer w0.3: P4.4@53.597,102.825 53.597,105.297 54.275,105.975 64.275,105.975 67.175,103.075 116.625,103.075 118.275,101.425 v1(118.275,61.875) ; U11.72@102.1,54.725 102.1,52.35 103.2,51.25 v1(103.2,48.475)
  Bottom Layer w0.3: v1(103.2,48.475) 104.8,46.875 116.45,46.875 118.275,48.7 v1(118.275,61.875)
PA14: P4.2 U11.76 | length 125.1
  Top Layer w0.3: v1(55.725,105.125) 63.275,105.125 66.133,102.267 115.658,102.267 117.4,100.525 117.4,58.825 114.025,55.45 107.875,55.45 106.975,56.35 U11.76@105.225,56.35
  Bottom Layer w0.3: P4.2@51.597,102.825 51.597,104.172 52.55,105.125 v1(55.725,105.125)
PA15: U11.77
PB0: C19.2 C23.1 IC2.1 P16.1 R25.2 U11.35 | length 125.2
  Top Layer w0.3: v1(24.8,43.95) 25.85,43.95 26.55,43.25 26.55,39.9 26.3,39.65 C19.2@25.45,39.65 ; v1(24.825,48.225) 24.825,48.655 25.355,49.186 IC2.1@26.379,49.186 ; P16.1@30.487,68.825 30.487,71.437 30.925,71.875 31.975,71.875 33.75,73.65 v1(33.75,76.6) ; v1@86.025,63.825 86.05,63.85 U11.35@89.975,63.85
  Top Layer w0.6: IC2.1@26.379,49.186 IC2.1@26.667,49.186 26.667,49.783 25.45,51 R25.2@25.45,51.975 25.45,53.3 25.85,53.7 32.775,53.7 33.036,53.961 C23.1@33.036,55.325 33.036,56.814 v1(33,56.85)
  Bottom Layer w0.3: v1(24.8,43.95) 24.8,48.2 v1(24.825,48.225) ; v1(33.75,76.6) 33.75,78.575 34.475,79.3 73.9,79.3 74.75,78.45 74.75,64.725 75.65,63.825 v1(85.975,63.825)
  Bottom Layer w0.6: P16.1@30.487,68.825 31.725,68.825 32.225,68.325 32.225,57.6 32.975,56.85 v1(33,56.85)
PB1: C53.2 C57.1 IC3.1 P18.1 R56.2 U11.36 | length 106.1
  Top Layer w0.3: v1@41.925,44.1 43.023,44.1 44,43.123 44,40.075 43.575,39.65 C53.2@42.914,39.65 ; P18.1@47.603,68.825 47.603,76.128 v1(47.625,76.15) ; v1@86.975,62.725 86.975,62.6 87.725,63.35 U11.36@89.975,63.35
  Top Layer w0.6: v1(41.561,49.186) 42.975,49.186 42.975,51.811 R56.2@43.139,51.975 ; R56.2@42.914,51.975 42.914,53.414 43.2,53.7 49.8,53.7 50.211,54.111 50.211,56.836 v1(50.225,56.85) ; IC3.1@43.139,49.186 IC3.1@43.783,49.186
  Bottom Layer w0.3: v1(41.561,49.186) 41.575,49.171 v1@41.575,44.45 ; v1(47.625,76.15) 48.45,76.975 72.325,76.975 72.925,76.375 72.925,63.85 74.05,62.725 v1(86.95,62.725)
  Bottom Layer w0.6: P18.1@47.603,68.825 49.55,68.825 50.225,68.15 50.225,65.089 50.175,65.039 50.175,56.9 v1(50.225,56.85)
  other v1: 41.575,44.075
PB3: U11.89
PB4: U11.90
PB5: U11.91
PB6: U11.92
PB7: U11.93
PB8: U11.95
PB9: U11.96
PB11: U11.48
PB12: U11.51
PB13: U11.52
PB14: U11.53
PB15: U11.54
PC0: C54.2 C59.1 IC4.1 P19.1 R60.2 U11.15 | length 100.8
  Top Layer w0.3: v1(59.15,44.15) 60,44.15 60.8,43.35 60.8,39.9 60.55,39.65 C54.2@59.739,39.65 ; v1(59.175,48.175) 59.175,48.825 59.636,49.286 IC4.1@60.8,49.286 ; v1(64.7,73.05) 64.7,83.15 66.65,85.1 90.875,85.1 92,83.975 v1@92,81.05 ; P19.1@64.72,68.825 P19.1@64.75,68.855 ; v1@92.05,81.05 v1@92.075,81.025 ; v1@95.55,75 95.675,74.875 95.675,72.475 96.6,71.55 U11.15@96.6,69.975
  Top Layer w0.6: IC4.1@60.8,49.286 60.8,49.55 59.7,50.65 59.7,51.936 R60.2@59.739,51.975 59.739,53.214 60.375,53.85 67.125,53.85 67.336,54.061 C59.1@67.336,55.425 67.336,57.014 v1(67.325,57.025)
  Bottom Layer w0.3: v1(59.15,44.15) 59.175,44.175 v1(59.175,48.175) ; v1(64.7,73.05) 64.72,73.03 P19.1@64.72,68.825 ; v1@92,80.975 92,78.7 v1(95.675,75.025)
  Bottom Layer w0.6: P19.1@64.72,68.825 65.875,68.825 66.3,68.4 66.3,58.05 v1(67.325,57.025)
  other v1: 92,81.025
PC1: U11.16
PC4: U11.33
PC5: U11.34
PC6: P13.1 R8.2 U11.63 | length 54.2
  Top Layer w0.3: P13.1@80.1,24.8 80.1,41.725 81.6,43.225 v1@97.45,43.225 ; U11.63@97.6,54.725 97.6,52.85 98.5,51.95 99.1,51.35 v1(99.1,48.475)
  Top Layer w0.6: R8.2@77.631,20.75 77.631,23.831 78.6,24.8 P13.1@80.1,24.8
  Bottom Layer w0.3: v1@97.45,43.275 98.5,43.275 99.1,43.875 v1(99.1,48.475)
  other v1: 97.45,43.25
PC7: P10.1 R6.2 U11.64 | length 38.6
  Top Layer w0.3: U11.64@98.1,54.725 98.1,53.219 100.15,51.169 v1(100.15,50.05) ; P10.1@98.335,25.05 98.335,28.394 99.725,29.784 99.725,34.575 98.335,35.965 98.335,38.425 100.15,40.24 v1(100.15,43.475)
  Top Layer w0.6: R6.2@95.931,20.75 95.931,24.181 96.8,25.05 P10.1@98.335,25.05
  Bottom Layer w0.3: v1(100.15,43.475) v1(100.15,50.05)
PC8: P9.1 R5.2 U11.65 | length 51.2
  Top Layer w0.3: U11.65@98.6,54.725 98.6,53.426 101.2,50.826 v1(101.2,48.475) ; 101.175,38.35 v1(101.175,42.3) ; 101.2,38.35 101.975,37.575 v1(105.75,37.575)
  Top Layer w0.6: R5.2@114.231,20.75 114.231,24.231 114.875,24.875 P9.1@116.435,24.875
  Bottom Layer w0.3: v1(101.175,42.3) 101.175,48.319 v1@101.2,48.344 ; v1(101.2,48.475) v1@101.331,48.344 ; v1(105.75,37.575) 115.625,37.575 116.435,36.765 P9.1@116.435,24.875
PC9: P8.1 R4.2 U11.66 | length 67.9
  Top Layer w0.3: U11.66@99.1,54.725 99.1,53.643 99.393,53.35 99.425,53.35 102.204,50.571 v1@102.204,49.925 ; v1@102.204,43.475 102.2,40.35 102.875,39.675 v1@105.725,39.675
  Top Layer w0.6: R4.2@132.531,20.75 132.531,24.506 133.025,25 P8.1@134.44,25
  Bottom Layer w0.3: v1@102.1,49.875 v1@102.204,49.979 ; v1(102.204,43.475) v1@102.204,49.875 ; v1@105.725,39.675 132.9,39.675 134.44,38.135 P8.1@134.44,25
  other v1: 105.75,39.675 102.204,50.05
PC10: P14.4 U11.78 | length 119.5
  Top Layer w0.3: P14.4@58.455,95.6 58.455,94.295 59.125,93.625 63,93.625 64.375,95 64.375,99.875 65.833,101.333 114.742,101.333 116.625,99.45 116.625,59.3 114.004,56.679 108.246,56.679 107.575,57.35 U11.78@105.225,57.35
PC11: P14.3 U11.79 | length 118.8
  Top Layer w0.3: P14.3@55.915,95.6 55.915,94.285 57.35,92.85 63.475,92.85 65.375,94.75 65.375,99.325 66.45,100.4 114.225,100.4 115.825,98.8 115.825,59.575 114.1,57.85 109.3,57.85 U11.79@105.225,57.85
PC12: U11.80
PC13: U11.7
PC14: U11.8
PC15: U11.9
PD0: U11.81
PD1: U11.82
PD2: U11.83
PD3: U11.84
PD4: U11.85
PD5: U11.86
PD6: U11.87
PD7: U11.88
PD8: P13.2 R7.2 U11.55 | length 47.1
  Top Layer w0.3: v1(90.375,48.475) 90.375,51.7 91.05,52.375 93.1,52.375 93.6,52.875 U11.55@93.6,54.725
  Top Layer w0.6: P13.2@82.64,24.8 86,24.8 86.781,24.019 R7.2@86.781,20.75
  Bottom Layer w0.3: P13.2@82.64,24.8 82.64,42.74 83.5,43.6 89.9,43.6 90.375,44.075 v1(90.375,48.475)
PD9: P10.2 R3.2 U11.56 | length 47.8
  Top Layer w0.3: v1(91.4,50.05) 91.4,51.325 91.85,51.775 93.375,51.775 94.1,52.5 U11.56@94.1,54.725
  Top Layer w0.6: P10.2@100.875,25.05 104.375,25.05 105.081,24.344 R3.2@105.081,20.75
  Bottom Layer w0.3: v1(91.4,50.05) 91.4,39.1 92.975,37.525 100,37.525 100.875,36.65 P10.2@100.875,25.05
PD10: P9.2 R2.2 U11.57 | length 64.6
  Top Layer w0.3: v1(92.475,48.475) 92.475,50.7 92.875,51.1 93.575,51.1 94.6,52.125 U11.57@94.6,54.725
  Top Layer w0.6: P9.2@118.975,24.875 122.5,24.875 123.381,23.994 R2.2@123.381,20.75
  Bottom Layer w0.3: v1(92.475,48.475) 92.475,39.525 93.3,38.7 117.925,38.7 118.975,37.65 P9.2@118.975,24.875
PD11: P8.2 R1.2 U11.58 | length 80.1
  Top Layer w0.3: v1(93.85,50.05) 93.85,50.125 95.1,51.375 U11.58@95.1,54.725
  Top Layer w0.6: P8.2@136.98,25 140.925,25 141.681,24.244 R1.2@141.681,20.75
  Bottom Layer w0.3: v1@93.825,50.05 93.825,41.475 94.575,40.725 134.7,40.725 136.98,38.445 P8.2@136.98,25
PD12: D16.1 U11.59 | length 48.9
  Top Layer w0.3: v1(94.95,42.25) 94.95,37.075 95.75,36.275 v1(96.35,36.275) ; v1(95.025,48.475) 95.025,50.375 95.6,50.95 95.6,53.643 U11.59@95.6,54.725 ; v1(99.575,36.325) 107.3,36.325 108.25,35.375 108.25,33.075 109.825,31.5 113.575,31.5 116.033,33.958 D16.1@121.228,33.958
  Bottom Layer w0.3: v1(94.95,42.25) 95.025,42.325 v1(95.025,48.475) ; v1(96.35,36.275) 99.525,36.275 v1(99.575,36.325)
PD13: D15.1 U11.60 | length 40
  Top Layer w0.3: v1(96.1,50.05) U11.60@96.1,54.725 ; v1(105.75,42.2) 115.75,42.2 119.296,38.654 D15.1@121.203,38.654
  Bottom Layer w0.3: v1(96.1,50.05) 96.1,42.075 96.95,41.225 103.875,41.225 104.85,42.2 v1(105.75,42.2)
PD14: D14.1 U11.61 | length 32.8
  Top Layer w0.3: U11.61@96.6,54.725 96.6,53.764 96.6,51.8 97.175,51.225 v1(97.175,48.475) 97.175,47.375 97.425,47.125 v1(103.2,47.125) ; v1(118.85,47.925) 121.035,47.925 D14.1@121.072,47.962
  Bottom Layer w0.3: v1(103.2,47.125) 104.3,46.025 116.95,46.025 v1(118.85,47.925)
PD15: D13.1 U11.62 | length 30.3
  Top Layer w0.3: U11.62@97.1,54.725 97.1,53.557 97.1,52.175 98.125,51.15 v1(98.125,50.05) ; v1(108.45,52.775) 108.521,52.704 D13.1@121.047,52.704
  Bottom Layer w0.3: v1(98.125,50.05) 98.125,51.975 98.925,52.775 v1(108.45,52.775)
PE0: U11.97
PE1: U11.98
PE5: U11.4
PE6: U11.5
PE7: U11.38
PE8: U11.39
PE9: U11.40
PE10: U11.41
PE11: U11.42
PE12: U11.43
PE13: U11.44
PE14: U11.45 | length 0
PE15: U11.46
Sensor_out_1: R20.1 U6.6 | length 10.2
  Top Layer w0.6: U6.6@8.29,33.895 12.345,33.895 13.339,34.889 R20.1@13.339,39.675
Sensor_out_2: R18.1 U5.6 | length 10.6
  Top Layer w0.6: U5.6@25.407,33.895 29.895,33.895 30.75,34.75 R18.1@30.75,39.675
Sensor_out_3: R49.1 U12.6 | length 10.7
  Top Layer w0.6: U12.6@42.523,33.895 47.02,33.895 47.95,34.825 R49.1@47.95,39.675
Sensor_out_4: R51.1 U10.6 | length 10.7
  Top Layer w0.6: U10.6@59.64,33.895 64.27,33.895 65.05,34.675 R51.1@65.05,39.675
SWIM: P4.3
V1: IC1.7 R17.2 R31.2 R33.1 | length 19.9
  Top Layer w0.6: IC1.7@14.65,47.916 16.566,47.916 v1(16.6,47.95) ; R17.2@15.643,58.65 15.694,58.599 17,58.599 ; v1(16.65,45.3) 16.682,45.332 R31.2@18.375,45.332 ; v1(17,53.925) 17,58.599 ; R33.1@18.35,58.599 17,58.599
  Bottom Layer w0.6: v1(16.65,45.3) 16.6,45.35 v1(16.6,47.95) 16.6,49.425 17,49.825 v1(17,53.925)
V2: IC2.7 R16.2 R27.2 R32.1 | length 27.2
  Top Layer w0.6: IC2.7@31.767,47.916 33.766,47.916 v1(33.8,47.95) ; R32.1@33.011,65.275 33.061,65.225 v1(34.525,65.225) ; R16.2@33.036,58.65 R16.2@33.362,58.325 ; R16.2@33.362,58.65 34.475,58.65 ; v1(33.85,45.35) 35.657,45.35 R27.2@35.675,45.332 ; v1(34.475,53.925) 34.475,58.325 34.475,60.125 v1(34.5,60.15)
  Bottom Layer w0.6: v1(33.85,45.35) 33.8,45.4 v1(33.8,47.95) 33.8,49.875 34.475,50.55 v1(34.475,53.925) ; v1(34.5,60.15) 34.5,65.2 v1(34.525,65.225)
V3: IC3.7 R47.2 R58.2 R63.1 | length 20.1
  Top Layer w0.6: IC3.7@48.883,47.916 50.916,47.916 v1(50.9,47.9) ; R47.2@50.236,58.625 50.262,58.599 51.076,58.599 R63.1@52.95,58.599 ; v1(50.925,45.4) 50.993,45.332 R58.2@52.8,45.332 ; v1(51.5,53.775) 51.5,58.599
  Bottom Layer w0.6: v1(50.925,45.4) 50.9,45.425 v1(50.9,47.9) 50.9,49.475 51.5,50.075 v1(51.5,53.775)
V4: IC4.7 R48.2 R62.2 R64.1 | length 27.4
  Top Layer w0.6: IC4.7@66,47.916 67.891,47.916 v1(67.9,47.925) ; R64.1@67.311,65.25 67.336,65.275 v1(68.825,65.275) ; R48.2@67.336,58.65 68.6,58.65 68.65,58.6 ; v1(67.9,45.15) 69.718,45.15 R62.2@69.9,45.332 ; v1(68.65,53.85) 68.65,58.6 ; v1(68.725,60.275) 68.65,60.2 68.65,58.6
  Bottom Layer w0.6: v1(67.9,45.15) v1(67.9,47.925) 67.85,47.975 67.85,49.65 68.65,50.45 v1(68.65,53.85) ; v1(68.725,60.275) 68.725,65.175 v1(68.825,65.275)
V_adder: R34.1 R36.1 R65.1 R66.1 U7.2 U7.6 | length 83.2
  Top Layer w0.6: R36.1@18.375,66.525 25.475,66.525 ; R34.1@25.475,65.325 25.475,66.525 ; U7.2@29.725,90.635 31.815,90.635 33.085,89.365 ; U7.6@34.825,89.365 33.085,89.365 ; R66.1@59.764,65.325 58.464,66.625 53.075,66.625 R65.1@52.975,66.525 52.975,76.425 52.15,77.25 35.85,77.25 ; 25.475,66.525 35.3,66.525 35.925,67.15 35.925,77.175 35.85,77.25 ; 33.085,89.365 33.085,79.34 35.175,77.25 35.85,77.25
pads on no net: H1.H H2.H H3.H H4.H LCD1. LCD1.10 LCD1.11 LCD1.12 LCD1.13 U1.1 U1.6 U1.7 U3.4 U4.4 U7.1 U7.5 U7.8 U8.4 U9.4

## Polygon pours and split planes (outlines as drawn)
GND on Top Layer "GND_L01_P010" (solid, remove dead copper, pour order 10): -0.075,113.4 0.225,113.7 147.4,113.7 147.4,0 147.325,0.075 -0.075,0.075
GND on Bottom Layer "GND_L02_P008" (solid, remove dead copper, pour order 8): 147.4,113.7 147.4,0 147.325,0.075 -0.075,0.075 -0.075,113.7

## Keep-outs
Top Layer:
  lines w0.254: -0.075,0.075 0,0
Keep-Out Layer:
  lines w0.254: -0.075,0.075 -0.075,113.7 147.4,113.7 147.4,0 0,0

## Silkscreen, mask and mechanical layers (free items; w line width, h text height)
Top Overlay:
  text "RST" at 46.944,100.175 h0.8
  text "+5V" at 49.769,92.925 h0.8
  text "RX" at 55.249,92.925 h0.8
  text "TX" at 57.789,92.925 h0.8
  text "GND" at 59.929,92.925 h0.8
  text "+5V" at 10.65,83.775 h0.8
  text "+3V" at 10.725,81.2 h0.8
  text "GND" at 10.65,78.708 h0.8
  text "-5V" at 10.65,76.175 h0.8
  text "VALVE 4" at 73.809,22.45 h0.8
  text "PUMP 4" at 83.359,22.45 h0.8
  text "VALVE 3" at 92.109,22.45 h0.8
  text "PUMP 3" at 101.659,22.45 h0.8
  text "VALVE 2" at 110.409,22.45 h0.8
  text "PUMP 2" at 119.959,22.45 h0.8
  text "VALVE 1" at 128.843,22.45 h0.8
  text "PUMP 1" at 138.392,22.45 h0.8